# EAGLE board Brakeman_array-old (EAGLE 7.7.0)
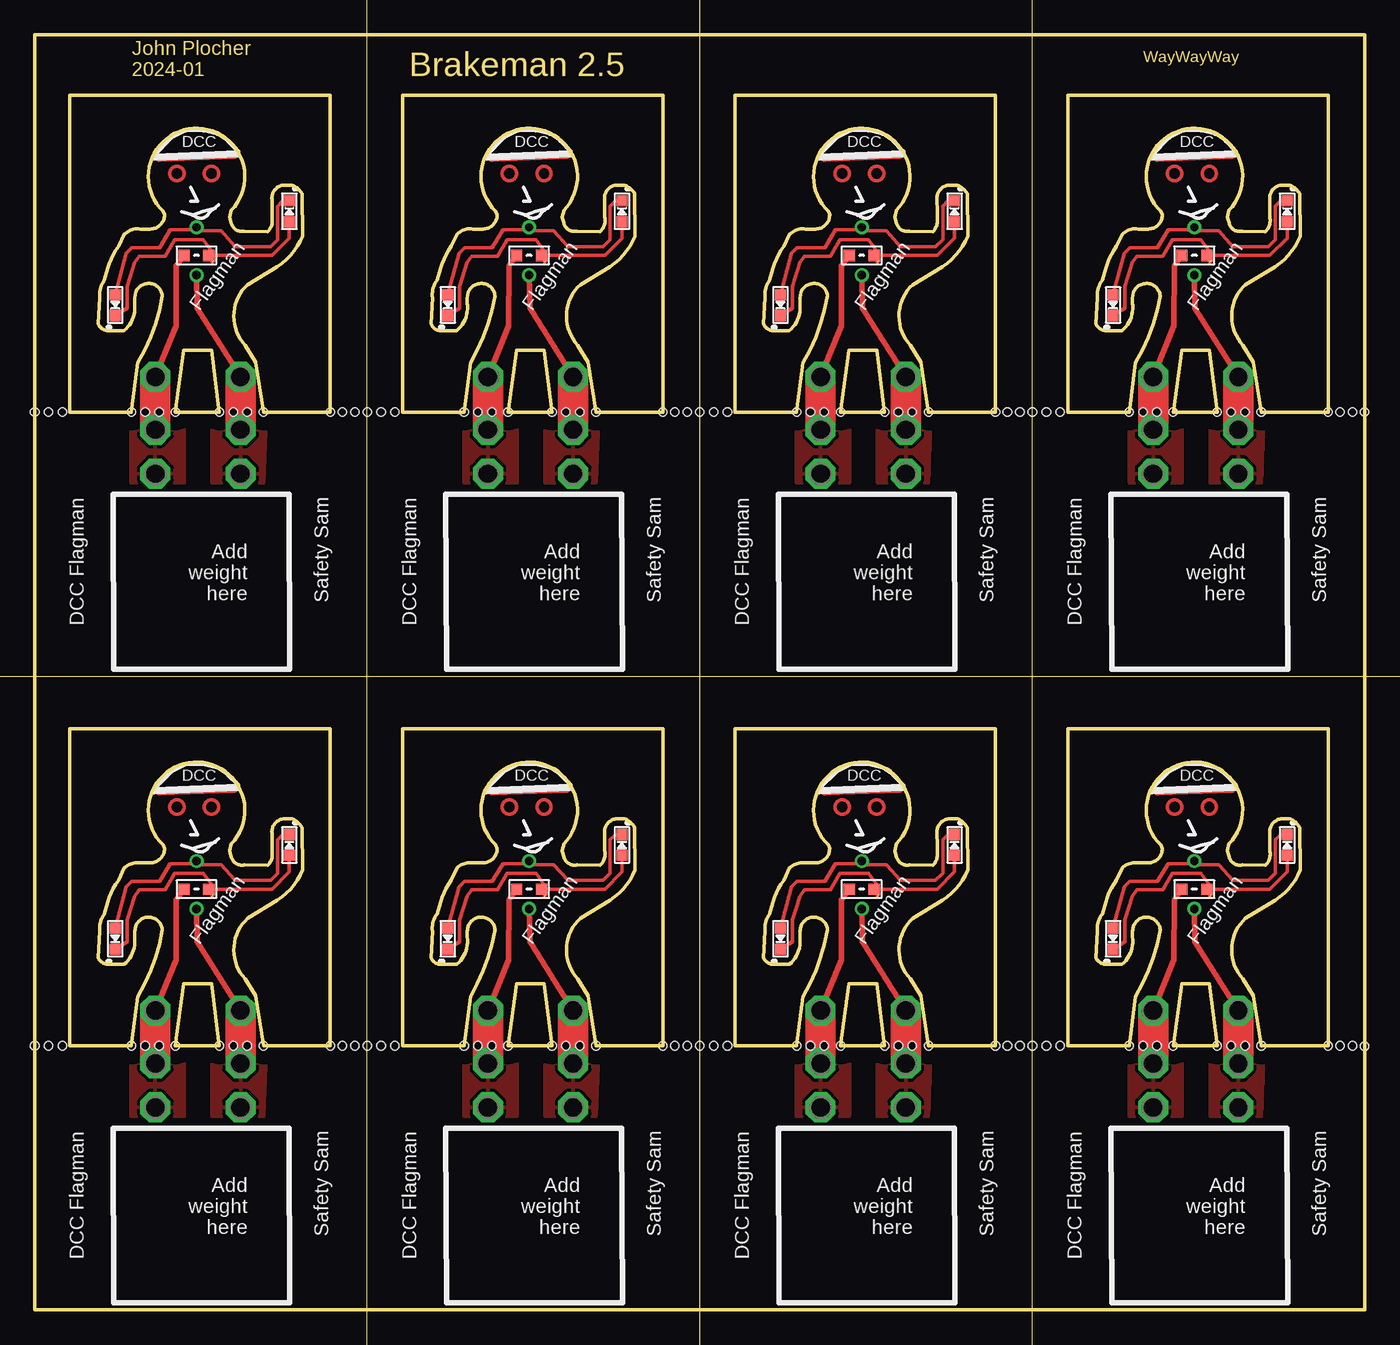
[diagram p0: board, top side]
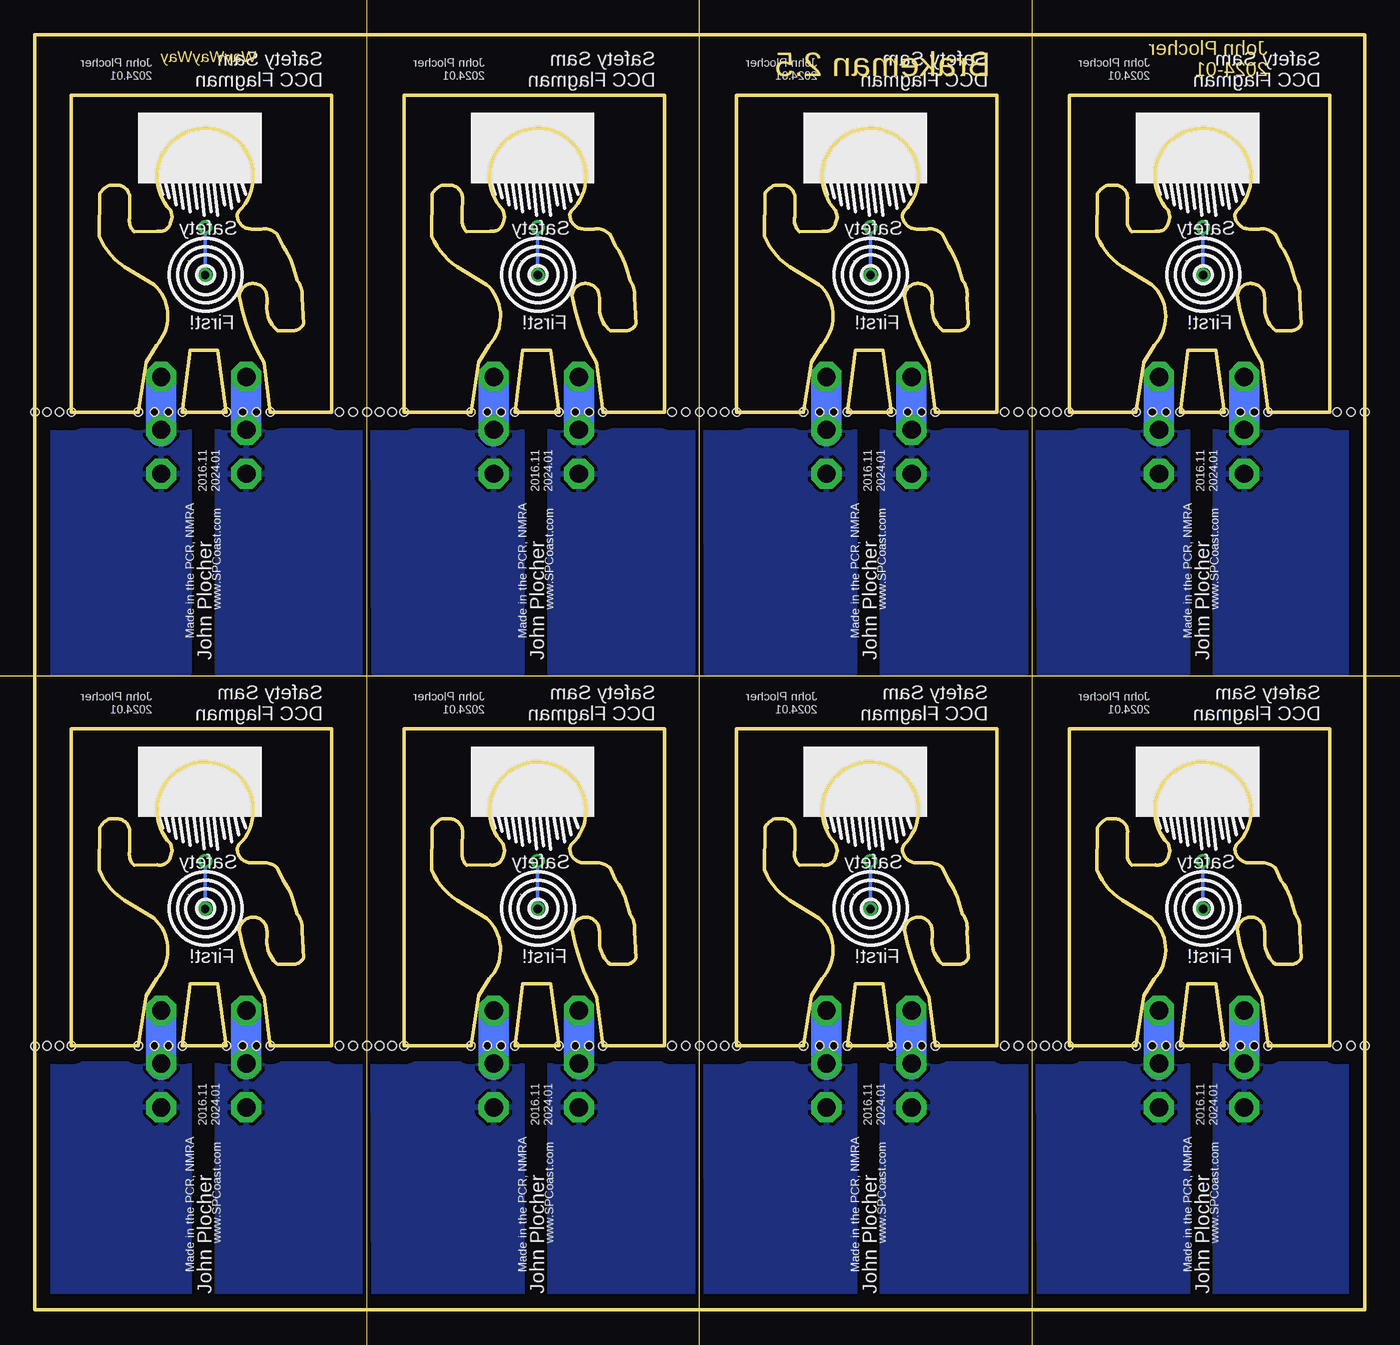
[diagram p1: board, bottom side, seen from below]

Size 96 x 92 mm. Coordinates in mm from the lower left corner, seen from the top.
Outline: 14.19,33.62 arc270 9.27,33.54 9.37,33.27 arc-90 8.36,32.26 7.63,32.26 arc53 6.48,31.88 6.06,31.01 arc21 5.29,29.42 5.03,28.56 arc43 4.7,27.3 4.59,25.41 arc63 5.3,24.92 6.45,24.92 arc59 7.21,26.91 7.21,27.28 7.29,27.69 arc-154 9.22,27.43 arc-21 7.44,22.61 6.99,19.05 2.54,19.05 2.54,41.91 21.34,41.91 21.34,19.05 16.51,19.05 15.95,22.66 15.19,23.88 arc-90 15.38,28.25 17.52,29.55 arc35 19.33,31.75 19.3,34.8 arc37 18.58,35.43 18.01,35.43 arc90 17.12,34.41 17.14,33.53 17.13,33.14 arc-59 16.81,32.06 15.14,32.11 arc-90 14.2,32.66 14.07,33.12 14.19,33.62
Outline: 13.34,19.05 12.77,23.53 10.77,23.53 10.16,19.05 13.34,19.05
Outline: 14.19,79.34 arc270 9.27,79.26 9.37,78.99 arc-90 8.36,77.98 7.63,77.98 arc53 6.48,77.6 6.06,76.73 arc21 5.29,75.14 5.03,74.28 arc43 4.7,73.02 4.59,71.13 arc63 5.3,70.64 6.45,70.64 arc59 7.21,72.63 7.21,73 7.29,73.41 arc-154 9.22,73.15 arc-21 7.44,68.33 6.99,64.77 2.54,64.77 2.54,87.63 21.34,87.63 21.34,64.77 16.51,64.77 15.95,68.38 15.19,69.6 arc-90 15.38,73.97 17.52,75.27 arc35 19.33,77.47 19.3,80.52 arc37 18.58,81.15 18.01,81.15 arc90 17.12,80.13 17.14,79.25 17.13,78.86 arc-59 16.81,77.78 15.14,77.83 arc-90 14.2,78.38 14.07,78.84 14.19,79.34
Outline: 13.34,64.77 12.77,69.25 10.77,69.25 10.16,64.77 13.34,64.77
Outline: 38.19,33.62 arc270 33.27,33.54 33.38,33.27 arc-90 32.36,32.26 31.63,32.26 arc53 30.48,31.88 30.06,31.01 arc21 29.29,29.42 29.03,28.56 arc43 28.7,27.3 28.6,25.41 arc63 29.3,24.92 30.45,24.92 arc59 31.22,26.91 31.22,27.28 31.29,27.69 arc-154 33.22,27.43 arc-21 31.45,22.61 30.99,19.05 26.54,19.05 26.54,41.91 45.34,41.91 45.34,19.05 40.51,19.05 39.95,22.66 39.19,23.88 arc-90 39.38,28.25 41.52,29.55 arc35 43.33,31.75 43.31,34.8 arc37 42.59,35.43 42.02,35.43 arc90 41.13,34.41 41.14,33.53 41.13,33.14 arc-59 40.81,32.06 39.14,32.11 arc-90 38.2,32.66 38.08,33.12 38.19,33.62
Outline: 37.34,19.05 36.77,23.53 34.77,23.53 34.16,19.05 37.34,19.05
Outline: 38.19,79.34 arc270 33.27,79.26 33.38,78.99 arc-90 32.36,77.98 31.63,77.98 arc53 30.48,77.6 30.06,76.73 arc21 29.29,75.14 29.03,74.28 arc43 28.7,73.02 28.6,71.13 arc63 29.3,70.64 30.45,70.64 arc59 31.22,72.63 31.22,73 31.29,73.41 arc-154 33.22,73.15 arc-21 31.45,68.33 30.99,64.77 26.54,64.77 26.54,87.63 45.34,87.63 45.34,64.77 40.51,64.77 39.95,68.38 39.19,69.6 arc-90 39.38,73.97 41.52,75.27 arc35 43.33,77.47 43.31,80.52 arc37 42.59,81.15 42.02,81.15 arc90 41.13,80.13 41.14,79.25 41.13,78.86 arc-59 40.81,77.78 39.14,77.83 arc-90 38.2,78.38 38.08,78.84 38.19,79.34
Outline: 37.34,64.77 36.77,69.25 34.77,69.25 34.16,64.77 37.34,64.77
Outline: 62.19,33.62 arc270 57.27,33.54 57.38,33.27 arc-90 56.36,32.26 55.63,32.26 arc53 54.48,31.88 54.07,31.01 arc21 53.3,29.42 53.03,28.56 arc43 52.7,27.3 52.6,25.41 arc63 53.3,24.92 54.45,24.92 arc59 55.22,26.91 55.22,27.28 55.3,27.69 arc-154 57.23,27.43 arc-21 55.45,22.61 54.99,19.05 50.55,19.05 50.55,41.91 69.34,41.91 69.34,19.05 64.52,19.05 63.96,22.66 63.2,23.88 arc-90 63.38,28.25 65.52,29.55 arc35 67.33,31.75 67.31,34.8 arc37 66.59,35.43 66.02,35.43 arc90 65.13,34.41 65.14,33.53 65.14,33.14 arc-59 64.81,32.06 63.14,32.11 arc-90 62.2,32.66 62.08,33.12 62.19,33.62
Outline: 61.34,19.05 60.77,23.53 58.77,23.53 58.17,19.05 61.34,19.05
Outline: 62.19,79.34 arc270 57.27,79.26 57.38,78.99 arc-90 56.36,77.98 55.63,77.98 arc53 54.48,77.6 54.07,76.73 arc21 53.3,75.14 53.03,74.28 arc43 52.7,73.02 52.6,71.13 arc63 53.3,70.64 54.45,70.64 arc59 55.22,72.63 55.22,73 55.3,73.41 arc-154 57.23,73.15 arc-21 55.45,68.33 54.99,64.77 50.55,64.77 50.55,87.63 69.34,87.63 69.34,64.77 64.52,64.77 63.96,68.38 63.2,69.6 arc-90 63.38,73.97 65.52,75.27 arc35 67.33,77.47 67.31,80.52 arc37 66.59,81.15 66.02,81.15 arc90 65.13,80.13 65.14,79.25 65.14,78.86 arc-59 64.81,77.78 63.14,77.83 arc-90 62.2,78.38 62.08,78.84 62.19,79.34
Outline: 61.34,64.77 60.77,69.25 58.77,69.25 58.17,64.77 61.34,64.77
Outline: 86.2,33.62 arc270 81.27,33.54 81.38,33.27 arc-90 80.37,32.26 79.64,32.26 arc53 78.49,31.88 78.07,31.01 arc21 77.3,29.42 77.04,28.56 arc43 76.71,27.3 76.6,25.41 arc63 77.31,24.92 78.45,24.92 arc59 79.22,26.91 79.22,27.28 79.3,27.69 arc-154 81.23,27.43 arc-21 79.45,22.61 78.99,19.05 74.55,19.05 74.55,41.91 93.34,41.91 93.34,19.05 88.52,19.05 87.96,22.66 87.2,23.88 arc-90 87.39,28.25 89.53,29.55 arc35 91.34,31.75 91.31,34.8 arc37 90.59,35.43 90.02,35.43 arc90 89.13,34.41 89.15,33.53 89.14,33.14 arc-59 88.82,32.06 87.15,32.11 arc-90 86.21,32.66 86.08,33.12 86.2,33.62
Outline: 85.34,19.05 84.77,23.53 82.77,23.53 82.17,19.05 85.34,19.05
Outline: 0,0 96,0 96,92 0,92 0,0
Outline: 86.2,79.34 arc270 81.27,79.26 81.38,78.99 arc-90 80.37,77.98 79.64,77.98 arc53 78.49,77.6 78.07,76.73 arc21 77.3,75.14 77.04,74.28 arc43 76.71,73.02 76.6,71.13 arc63 77.31,70.64 78.45,70.64 arc59 79.22,72.63 79.22,73 79.3,73.41 arc-154 81.23,73.15 arc-21 79.45,68.33 78.99,64.77 74.55,64.77 74.55,87.63 93.34,87.63 93.34,64.77 88.52,64.77 87.96,68.38 87.2,69.6 arc-90 87.39,73.97 89.53,75.27 arc35 91.34,77.47 91.31,80.52 arc37 90.59,81.15 90.02,81.15 arc90 89.13,80.13 89.15,79.25 89.14,78.86 arc-59 88.82,77.78 87.15,77.83 arc-90 86.21,78.38 86.08,78.84 86.2,79.34
Outline: 85.34,64.77 84.77,69.25 82.77,69.25 82.17,64.77 85.34,64.77
Copper layers (1*16): Top 0.035mm / dielectric 1.5mm / Bottom 0.035mm
Design rules "default": minimum track width 10mil, minimum drill 0.6mm, track to track 8mil, track to pad 8mil, pad to pad 8mil, via to via 8mil, smd to smd 8mil, copper to edge 40mil, drill to drill 8mil, minimum pad ring 10mil, minimum via ring 8mil, stop-mask expansion 4mil, vias tented up to drill 0mil, thermal gap 10mil
Holes 0.6 mm at 6.99,19.05 10.16,19.05 13.34,19.05 16.51,19.05 0,19.05 21.34,19.05 1,19.05 2,19.05 7.99,19.05 8.98,19.05 14.34,19.05 15.34,19.05 22.2,19.05 23.1,19.05 6.99,64.77 10.16,64.77 13.34,64.77 16.51,64.77 0,64.77 21.34,64.77 1,64.77 2,64.77 7.99,64.77 8.98,64.77 14.34,64.77 15.34,64.77 22.2,64.77 23.1,64.77 30.99,19.05 34.16,19.05 37.34,19.05 40.51,19.05 24,19.05 45.34,19.05 25,19.05 26,19.05 31.99,19.05 32.99,19.05 38.34,19.05 39.34,19.05 46.2,19.05 47.1,19.05 30.99,64.77 34.16,64.77 37.34,64.77 40.51,64.77 24,64.77 45.34,64.77 25,64.77 26,64.77 31.99,64.77 32.99,64.77 38.34,64.77 39.34,64.77 46.2,64.77 47.1,64.77 54.99,19.05 58.17,19.05 61.34,19.05 64.52,19.05 48.01,19.05 69.34,19.05 49.01,19.05 50.01,19.05 55.99,19.05 56.99,19.05 62.34,19.05 63.34,19.05 70.21,19.05 71.11,19.05 54.99,64.77 58.17,64.77 61.34,64.77 64.52,64.77 48.01,64.77 69.34,64.77 49.01,64.77 50.01,64.77 55.99,64.77 56.99,64.77 62.34,64.77 63.34,64.77 70.21,64.77 71.11,64.77 78.99,19.05 82.17,19.05 85.34,19.05 88.52,19.05 72.01,19.05 93.34,19.05 73.01,19.05 74.01,19.05 79.99,19.05 80.99,19.05 86.34,19.05 87.34,19.05 94.21,19.05 95.11,19.05 78.99,64.77 82.17,64.77 85.34,64.77 88.52,64.77 72.01,64.77 93.34,64.77 73.01,64.77 74.01,64.77 79.99,64.77 80.99,64.77 86.34,64.77 87.34,64.77 94.21,64.77 95.11,64.77 95.97,64.77 95.97,19.02
Milling: 4 lines

## Footprints (pad centres in the part's own frame; a part is rotated, then mirrored left to right if it is on the bottom)
0603-LED = smd 0.8 x 0.8: A 0.75,0; C -0.75,0
0603-RES = smd 0.813 x 0.813: 1 -0.9,0; 2 0.9,0
P1-13 = drill 1.321 pad 2.159 octagon: TP 0,0

## Placement (x,y rotation side)
LED1X11  R  [0603-LED]  5.82,26.77 90 top
LED1X12  R  [0603-LED]  5.82,72.49 90 top
LED1X21  R  [0603-LED]  29.82,26.77 90 top
LED1X22  R  [0603-LED]  29.82,72.49 90 top
LED1X31  R  [0603-LED]  53.82,26.77 90 top
LED1X32  R  [0603-LED]  53.82,72.49 90 top
LED1X41  R  [0603-LED]  77.82,26.77 90 top
LED1X42  R  [0603-LED]  77.82,72.49 90 top
LED2X11  R  [0603-LED]  18.39,33.55 270 top
LED2X12  R  [0603-LED]  18.39,79.27 270 top
LED2X21  R  [0603-LED]  42.39,33.55 270 top
LED2X22  R  [0603-LED]  42.39,79.27 270 top
LED2X31  R  [0603-LED]  66.39,33.55 270 top
LED2X32  R  [0603-LED]  66.39,79.27 270 top
LED2X41  R  [0603-LED]  90.39,33.55 270 top
LED2X42  R  [0603-LED]  90.39,79.27 270 top
R1KX11  1k0  [0603-RES]  11.68,30.35 180 top
R1KX12  1k0  [0603-RES]  11.68,76.07 180 top
R1KX21  1k0  [0603-RES]  35.69,30.35 180 top
R1KX22  1k0  [0603-RES]  35.69,76.07 180 top
R1KX31  1k0  [0603-RES]  59.69,30.35 180 top
R1KX32  1k0  [0603-RES]  59.69,76.07 180 top
R1KX41  1k0  [0603-RES]  83.69,30.35 180 top
R1KX42  1k0  [0603-RES]  83.69,76.07 180 top
TP1X11  PTR1PAD1-13  [P1-13]  8.71,17.78 90 top
TP1X12  PTR1PAD1-13  [P1-13]  8.71,63.5 90 top
TP1X21  PTR1PAD1-13  [P1-13]  32.72,17.78 90 top
TP1X22  PTR1PAD1-13  [P1-13]  32.72,63.5 90 top
TP1X31  PTR1PAD1-13  [P1-13]  56.72,17.78 90 top
TP1X32  PTR1PAD1-13  [P1-13]  56.72,63.5 90 top
TP1X41  PTR1PAD1-13  [P1-13]  80.72,17.78 90 top
TP1X42  PTR1PAD1-13  [P1-13]  80.72,63.5 90 top
TP2X11  PTR1PAD1-13  [P1-13]  8.71,14.61 0 top
TP2X12  PTR1PAD1-13  [P1-13]  8.71,60.33 0 top
TP2X21  PTR1PAD1-13  [P1-13]  32.72,14.61 0 top
TP2X22  PTR1PAD1-13  [P1-13]  32.72,60.33 0 top
TP2X31  PTR1PAD1-13  [P1-13]  56.72,14.61 0 top
TP2X32  PTR1PAD1-13  [P1-13]  56.72,60.33 0 top
TP2X41  PTR1PAD1-13  [P1-13]  80.72,14.61 0 top
TP2X42  PTR1PAD1-13  [P1-13]  80.72,60.33 0 top
TP3X11  PTR1PAD1-13  [P1-13]  14.86,17.78 0 top
TP3X12  PTR1PAD1-13  [P1-13]  14.86,63.5 0 top
TP3X21  PTR1PAD1-13  [P1-13]  38.86,17.78 0 top
TP3X22  PTR1PAD1-13  [P1-13]  38.86,63.5 0 top
TP3X31  PTR1PAD1-13  [P1-13]  62.87,17.78 0 top
TP3X32  PTR1PAD1-13  [P1-13]  62.87,63.5 0 top
TP3X41  PTR1PAD1-13  [P1-13]  86.87,17.78 0 top
TP3X42  PTR1PAD1-13  [P1-13]  86.87,63.5 0 top
TP4X11  PTR1PAD1-13  [P1-13]  14.86,14.61 0 top
TP4X12  PTR1PAD1-13  [P1-13]  14.86,60.33 0 top
TP4X21  PTR1PAD1-13  [P1-13]  38.86,14.61 0 top
TP4X22  PTR1PAD1-13  [P1-13]  38.86,60.33 0 top
TP4X31  PTR1PAD1-13  [P1-13]  62.87,14.61 0 top
TP4X32  PTR1PAD1-13  [P1-13]  62.87,60.33 0 top
TP4X41  PTR1PAD1-13  [P1-13]  86.87,14.61 0 top
TP4X42  PTR1PAD1-13  [P1-13]  86.87,60.33 0 top
TP5X11  PTR1PAD1-13  [P1-13]  8.71,21.59 0 top
TP5X12  PTR1PAD1-13  [P1-13]  8.71,67.31 0 top
TP5X21  PTR1PAD1-13  [P1-13]  32.72,21.59 0 top
TP5X22  PTR1PAD1-13  [P1-13]  32.72,67.31 0 top
TP5X31  PTR1PAD1-13  [P1-13]  56.72,21.59 0 top
TP5X32  PTR1PAD1-13  [P1-13]  56.72,67.31 0 top
TP5X41  PTR1PAD1-13  [P1-13]  80.72,21.59 0 top
TP5X42  PTR1PAD1-13  [P1-13]  80.72,67.31 0 top
TP6X11  PTR1PAD1-13  [P1-13]  14.86,21.59 0 top
TP6X12  PTR1PAD1-13  [P1-13]  14.86,67.31 0 top
TP6X21  PTR1PAD1-13  [P1-13]  38.86,21.59 0 top
TP6X22  PTR1PAD1-13  [P1-13]  38.86,67.31 0 top
TP6X31  PTR1PAD1-13  [P1-13]  62.87,21.59 0 top
TP6X32  PTR1PAD1-13  [P1-13]  62.87,67.31 0 top
TP6X41  PTR1PAD1-13  [P1-13]  86.87,21.59 0 top
TP6X42  PTR1PAD1-13  [P1-13]  86.87,67.31 0 top

## Library data of the parts
LED1X11 LED1X12 LED1X21 LED1X22 LED1X31 LED1X32 LED1X41 LED1X42 LED2X11 LED2X12 LED2X21 LED2X22 LED2X31 LED2X32 LED2X41 LED2X42 R1KX11 R1KX12 R1KX21 R1KX22 R1KX31 R1KX32 R1KX41 R1KX42 = SPCoast
TP1X11 TP1X12 TP1X21 TP1X22 TP1X31 TP1X32 TP1X41 TP1X42 TP2X11 TP2X12 TP2X21 TP2X22 TP2X31 TP2X32 TP2X41 TP2X42 TP3X11 TP3X12 TP3X21 TP3X22 TP3X31 TP3X32 TP3X41 TP3X42 TP4X11 TP4X12 TP4X21 TP4X22 TP4X31 TP4X32 TP4X41 TP4X42 TP5X11 TP5X12 TP5X21 TP5X22 TP5X31 TP5X32 TP5X41 TP5X42 TP6X11 TP6X12 TP6X21 TP6X22 TP6X31 TP6X32 TP6X41 TP6X42 = testpad

## Nets
LIMITEDX11: LED1X11.C LED2X11.A R1KX11.1
LIMITEDX12: LED1X12.C LED2X12.A R1KX12.1
LIMITEDX21: LED1X21.C LED2X21.A R1KX21.1
LIMITEDX22: LED1X22.C LED2X22.A R1KX22.1
LIMITEDX31: LED1X31.C LED2X31.A R1KX31.1
LIMITEDX32: LED1X32.C LED2X32.A R1KX32.1
LIMITEDX41: LED1X41.C LED2X41.A R1KX41.1
LIMITEDX42: LED1X42.C LED2X42.A R1KX42.1
NX11: LED1X11.A LED2X11.C TP3X11.TP TP4X11.TP TP6X11.TP
NX12: LED1X12.A LED2X12.C TP3X12.TP TP4X12.TP TP6X12.TP
NX21: LED1X21.A LED2X21.C TP3X21.TP TP4X21.TP TP6X21.TP
NX22: LED1X22.A LED2X22.C TP3X22.TP TP4X22.TP TP6X22.TP
NX31: LED1X31.A LED2X31.C TP3X31.TP TP4X31.TP TP6X31.TP
NX32: LED1X32.A LED2X32.C TP3X32.TP TP4X32.TP TP6X32.TP
NX41: LED1X41.A LED2X41.C TP3X41.TP TP4X41.TP TP6X41.TP
NX42: LED1X42.A LED2X42.C TP3X42.TP TP4X42.TP TP6X42.TP
SX11: R1KX11.2 TP1X11.TP TP2X11.TP TP5X11.TP
SX12: R1KX12.2 TP1X12.TP TP2X12.TP TP5X12.TP
SX21: R1KX21.2 TP1X21.TP TP2X21.TP TP5X21.TP
SX22: R1KX22.2 TP1X22.TP TP2X22.TP TP5X22.TP
SX31: R1KX31.2 TP1X31.TP TP2X31.TP TP5X31.TP
SX32: R1KX32.2 TP1X32.TP TP2X32.TP TP5X32.TP
SX41: R1KX41.2 TP1X41.TP TP2X41.TP TP5X41.TP
SX42: R1KX42.2 TP1X42.TP TP2X42.TP TP5X42.TP

## Tracks (layer width: path | path; a pad name or v marks a point on that pad's centre or on a via)
LIMITEDX11  (1 unrouted)
  Top 0.254: 12.91,29.97 arc90 R1KX11.1 17.14,30.35 18.39,31.59 LED2X11.A | 12.8,29.86 12.8,30.63 12.17,31.5 10.1,31.5 9.42,30.31 7.55,30.31 7.22,29.86 6.67,28.15 6.67,26.55 LED1X11.C
LIMITEDX12  (1 unrouted)
  Top 0.254: 12.91,75.69 arc90 R1KX12.1 17.14,76.07 18.39,77.31 LED2X12.A | 12.8,75.58 12.8,76.35 12.17,77.22 10.1,77.22 9.42,76.03 7.55,76.03 7.22,75.58 6.67,73.87 6.67,72.27 LED1X12.C
LIMITEDX21  (1 unrouted)
  Top 0.254: 36.92,29.97 arc90 R1KX21.1 41.15,30.35 42.39,31.59 LED2X21.A | 36.8,29.86 36.8,30.63 36.17,31.5 34.1,31.5 33.42,30.31 31.55,30.31 31.22,29.86 30.68,28.15 30.68,26.55 LED1X21.C
LIMITEDX22  (1 unrouted)
  Top 0.254: 36.92,75.69 arc90 R1KX22.1 41.15,76.07 42.39,77.31 LED2X22.A | 36.8,75.58 36.8,76.35 36.17,77.22 34.1,77.22 33.42,76.03 31.55,76.03 31.22,75.58 30.68,73.87 30.68,72.27 LED1X22.C
LIMITEDX31  (1 unrouted)
  Top 0.254: 60.92,29.97 arc90 R1KX31.1 65.15,30.35 66.39,31.59 LED2X31.A | 60.81,29.86 60.81,30.63 60.17,31.5 58.1,31.5 57.42,30.31 55.55,30.31 55.23,29.86 54.68,28.15 54.68,26.55 LED1X31.C
LIMITEDX32  (1 unrouted)
  Top 0.254: 60.92,75.69 arc90 R1KX32.1 65.15,76.07 66.39,77.31 LED2X32.A | 60.81,75.58 60.81,76.35 60.17,77.22 58.1,77.22 57.42,76.03 55.55,76.03 55.23,75.58 54.68,73.87 54.68,72.27 LED1X32.C
LIMITEDX41  (1 unrouted)
  Top 0.254: 84.92,29.97 arc90 R1KX41.1 89.15,30.35 90.39,31.59 LED2X41.A | 84.81,29.86 84.81,30.63 84.18,31.5 82.11,31.5 81.43,30.31 79.56,30.31 79.23,29.86 78.68,28.15 78.68,26.55 LED1X41.C
LIMITEDX42  (1 unrouted)
  Top 0.254: 84.92,75.69 arc90 R1KX42.1 89.15,76.07 90.39,77.31 LED2X42.A | 84.81,75.58 84.81,76.35 84.18,77.22 82.11,77.22 81.43,76.03 79.56,76.03 79.23,75.58 78.68,73.87 78.68,72.27 LED1X42.C
NX11  (via drill 0.6 pad 1.01)
  Top 0.254: LED1X11.A 6.62,30.51 7.02,30.91 9.02,30.91 9.8,32.2 11.49,32.2 v11.68,32.38 11.94,32.13 13.46,32.13 14.48,30.99 17.02,30.99 17.53,31.5 17.53,33.91 17.91,34.3 LED2X11.C
  Top 0.406: TP6X11.TP 11.73,26.54 v11.68,28.93
  Top 2.184: TP6X11.TP TP3X11.TP
  Bottom 0.254: v11.68,28.93 v11.68,32.38
  Bottom 2.184: TP6X11.TP 14.86,17.68
  pour Top: 12.83,20.32 16.76,20.32 16.51,13.97 12.83,13.97
  pour Bottom: 12.83,18.8 12.83,0.25 23.5,0.25 23.55,18.8
NX12  (via drill 0.6 pad 1.01)
  Top 0.254: LED1X12.A 6.62,76.23 7.02,76.63 9.02,76.63 9.8,77.92 11.49,77.92 v11.68,78.11 11.94,77.85 13.46,77.85 14.48,76.71 17.02,76.71 17.53,77.22 17.53,79.63 17.91,80.02 LED2X12.C
  Top 0.406: TP6X12.TP 11.73,72.26 v11.68,74.65
  Top 2.184: TP6X12.TP TP3X12.TP
  Bottom 0.254: v11.68,74.65 v11.68,78.11
  Bottom 2.184: TP6X12.TP 14.86,63.4
  pour Top: 12.83,66.04 16.76,66.04 16.51,59.69 12.83,59.69
  pour Bottom: 12.83,64.52 12.83,45.97 23.5,45.97 23.55,64.52
NX21  (via drill 0.6 pad 1.01)
  Top 0.254: LED1X21.A 30.62,30.51 31.02,30.91 33.02,30.91 33.8,32.2 35.49,32.2 v35.69,32.38 35.94,32.13 37.47,32.13 38.48,30.99 41.02,30.99 41.53,31.5 41.53,33.91 41.91,34.3 LED2X21.C
  Top 0.406: TP6X21.TP 35.74,26.54 v35.69,28.93
  Top 2.184: TP6X21.TP TP3X21.TP
  Bottom 0.254: v35.69,28.93 v35.69,32.38
  Bottom 2.184: TP6X21.TP 38.86,17.68
  pour Top: 36.83,20.32 40.77,20.32 40.51,13.97 36.83,13.97
  pour Bottom: 36.83,18.8 36.83,0.25 47.5,0.25 47.55,18.8
NX22  (via drill 0.6 pad 1.01)
  Top 0.254: LED1X22.A 30.62,76.23 31.02,76.63 33.02,76.63 33.8,77.92 35.49,77.92 v35.69,78.11 35.94,77.85 37.47,77.85 38.48,76.71 41.02,76.71 41.53,77.22 41.53,79.63 41.91,80.02 LED2X22.C
  Top 0.406: TP6X22.TP 35.74,72.26 v35.69,74.65
  Top 2.184: TP6X22.TP TP3X22.TP
  Bottom 0.254: v35.69,74.65 v35.69,78.11
  Bottom 2.184: TP6X22.TP 38.86,63.4
  pour Top: 36.83,66.04 40.77,66.04 40.51,59.69 36.83,59.69
  pour Bottom: 36.83,64.52 36.83,45.97 47.5,45.97 47.55,64.52
NX31  (via drill 0.6 pad 1.01)
  Top 0.254: LED1X31.A 54.62,30.51 55.02,30.91 57.02,30.91 57.81,32.2 59.49,32.2 v59.69,32.38 59.94,32.13 61.47,32.13 62.48,30.99 65.02,30.99 65.53,31.5 65.53,33.91 65.92,34.3 LED2X31.C
  Top 0.406: TP6X31.TP 59.74,26.54 v59.69,28.93
  Top 2.184: TP6X31.TP TP3X31.TP
  Bottom 0.254: v59.69,28.93 v59.69,32.38
  Bottom 2.184: TP6X31.TP 62.87,17.68
  pour Top: 60.83,20.32 64.77,20.32 64.52,13.97 60.83,13.97
  pour Bottom: 60.83,18.8 60.83,0.25 71.51,0.25 71.56,18.8
NX32  (via drill 0.6 pad 1.01)
  Top 0.254: LED1X32.A 54.62,76.23 55.02,76.63 57.02,76.63 57.81,77.92 59.49,77.92 v59.69,78.11 59.94,77.85 61.47,77.85 62.48,76.71 65.02,76.71 65.53,77.22 65.53,79.63 65.92,80.02 LED2X32.C
  Top 0.406: TP6X32.TP 59.74,72.26 v59.69,74.65
  Top 2.184: TP6X32.TP TP3X32.TP
  Bottom 0.254: v59.69,74.65 v59.69,78.11
  Bottom 2.184: TP6X32.TP 62.87,63.4
  pour Top: 60.83,66.04 64.77,66.04 64.52,59.69 60.83,59.69
  pour Bottom: 60.83,64.52 60.83,45.97 71.51,45.97 71.56,64.52
NX41  (via drill 0.6 pad 1.01)
  Top 0.254: LED1X41.A 78.63,30.51 79.03,30.91 81.03,30.91 81.81,32.2 83.5,32.2 v83.69,32.38 83.95,32.13 85.47,32.13 86.49,30.99 89.03,30.99 89.53,31.5 89.53,33.91 89.92,34.3 LED2X41.C
  Top 0.406: TP6X41.TP 83.74,26.54 v83.69,28.93
  Top 2.184: TP6X41.TP TP3X41.TP
  Bottom 0.254: v83.69,28.93 v83.69,32.38
  Bottom 2.184: TP6X41.TP 86.87,17.68
  pour Top: 84.84,20.32 88.77,20.32 88.52,13.97 84.84,13.97
  pour Bottom: 84.84,18.8 84.84,0.25 95.51,0.25 95.56,18.8
NX42  (via drill 0.6 pad 1.01)
  Top 0.254: LED1X42.A 78.63,76.23 79.03,76.63 81.03,76.63 81.81,77.92 83.5,77.92 v83.69,78.11 83.95,77.85 85.47,77.85 86.49,76.71 89.03,76.71 89.53,77.22 89.53,79.63 89.92,80.02 LED2X42.C
  Top 0.406: TP6X42.TP 83.74,72.26 v83.69,74.65
  Top 2.184: TP6X42.TP TP3X42.TP
  Bottom 0.254: v83.69,74.65 v83.69,78.11
  Bottom 2.184: TP6X42.TP 86.87,63.4
  pour Top: 84.84,66.04 88.77,66.04 88.52,59.69 84.84,59.69
  pour Bottom: 84.84,64.52 84.84,45.97 95.51,45.97 95.56,64.52
S$1X11
  Top 0.61: 9,37.4 14.4,37.6
S$1X12
  Top 0.61: 9,83.12 14.4,83.32
S$1X21
  Top 0.61: 33,37.4 38.4,37.6
S$1X22
  Top 0.61: 33,83.12 38.4,83.32
S$1X31
  Top 0.61: 57.01,37.4 62.41,37.6
S$1X32
  Top 0.61: 57.01,83.12 62.41,83.32
S$1X41
  Top 0.61: 81.01,37.4 86.41,37.6
S$1X42
  Top 0.61: 81.01,83.12 86.41,83.32
SX11
  Top 0.406: TP5X11.TP 10.21,25.27 10.22,29.61 R1KX11.2
  Top 2.184: TP5X11.TP TP1X11.TP
  Bottom 2.184: TP5X11.TP 8.71,17.73
  pour Top: 6.99,20.32 10.79,20.32 10.79,13.97 6.99,13.97
  pour Bottom: 0.5,18.8 10.79,18.8 10.79,0.25 0.5,0.25
SX12
  Top 0.406: TP5X12.TP 10.21,70.99 10.22,75.33 R1KX12.2
  Top 2.184: TP5X12.TP TP1X12.TP
  Bottom 2.184: TP5X12.TP 8.71,63.45
  pour Top: 6.99,66.04 10.79,66.04 10.79,59.69 6.99,59.69
  pour Bottom: 0.5,64.52 10.79,64.52 10.79,45.97 0.5,45.97
SX21
  Top 0.406: TP5X21.TP 34.21,25.27 34.23,29.61 R1KX21.2
  Top 2.184: TP5X21.TP TP1X21.TP
  Bottom 2.184: TP5X21.TP 32.72,17.73
  pour Top: 30.99,20.32 34.8,20.32 34.8,13.97 30.99,13.97
  pour Bottom: 24.5,18.8 34.8,18.8 34.8,0.25 24.5,0.25
SX22
  Top 0.406: TP5X22.TP 34.21,70.99 34.23,75.33 R1KX22.2
  Top 2.184: TP5X22.TP TP1X22.TP
  Bottom 2.184: TP5X22.TP 32.72,63.45
  pour Top: 30.99,66.04 34.8,66.04 34.8,59.69 30.99,59.69
  pour Bottom: 24.5,64.52 34.8,64.52 34.8,45.97 24.5,45.97
SX31
  Top 0.406: TP5X31.TP 58.22,25.27 58.23,29.61 R1KX31.2
  Top 2.184: TP5X31.TP TP1X31.TP
  Bottom 2.184: TP5X31.TP 56.72,17.73
  pour Top: 54.99,20.32 58.8,20.32 58.8,13.97 54.99,13.97
  pour Bottom: 48.51,18.8 58.8,18.8 58.8,0.25 48.51,0.25
SX32
  Top 0.406: TP5X32.TP 58.22,70.99 58.23,75.33 R1KX32.2
  Top 2.184: TP5X32.TP TP1X32.TP
  Bottom 2.184: TP5X32.TP 56.72,63.45
  pour Top: 54.99,66.04 58.8,66.04 58.8,59.69 54.99,59.69
  pour Bottom: 48.51,64.52 58.8,64.52 58.8,45.97 48.51,45.97
SX41
  Top 0.406: TP5X41.TP 82.22,25.27 82.23,29.61 R1KX41.2
  Top 2.184: TP5X41.TP TP1X41.TP
  Bottom 2.184: TP5X41.TP 80.72,17.73
  pour Top: 78.99,20.32 82.8,20.32 82.8,13.97 78.99,13.97
  pour Bottom: 72.51,18.8 82.8,18.8 82.8,0.25 72.51,0.25
SX42
  Top 0.406: TP5X42.TP 82.22,70.99 82.23,75.33 R1KX42.2
  Top 2.184: TP5X42.TP TP1X42.TP
  Bottom 2.184: TP5X42.TP 80.72,63.45
  pour Top: 78.99,66.04 82.8,66.04 82.8,59.69 78.99,59.69
  pour Bottom: 72.51,64.52 82.8,64.52 82.8,45.97 72.51,45.97
(copper drawn outside any net)
  shapes: Top circle x16

## Text on the board
Dimension: WayWayWay | John Plocher / 2024-01 | Brakeman 2.5
tPlace: DCC | DCC | DCC | DCC | Flagman | Flagman | Flagman | Flagman | DCC Flagman | DCC Flagman | DCC Flagman | DCC Flagman | Add / weight / here | Add / weight / here | Add / weight / here | Add / weight / here | Safety Sam | Safety Sam | Safety Sam | Safety Sam | DCC | DCC | DCC | DCC | Flagman | Flagman | Flagman | Flagman | DCC Flagman | DCC Flagman | DCC Flagman | DCC Flagman | Add / weight / here | Add / weight / here | Add / weight / here | Add / weight / here | Safety Sam | Safety Sam | Safety Sam | Safety Sam
bPlace: John Plocher / 2024.01 | John Plocher / 2024.01 | John Plocher / 2024.01 | John Plocher / 2024.01 | Safety Sam / DCC Flagman | Safety Sam / DCC Flagman | Safety Sam / DCC Flagman | Safety Sam / DCC Flagman | Safety | Safety | Safety | Safety | First! | First! | First! | First! | 2016.11 / 2024.01 | 2016.11 / 2024.01 | 2016.11 / 2024.01 | 2016.11 / 2024.01 | www.SPCoast.com | www.SPCoast.com | www.SPCoast.com | www.SPCoast.com | Made in the PCR, NMRA | Made in the PCR, NMRA | Made in the PCR, NMRA | Made in the PCR, NMRA | John Plocher | John Plocher | John Plocher | John Plocher | Safety Sam / DCC Flagman | John Plocher / 2024.01 | Safety Sam / DCC Flagman | John Plocher / 2024.01 | Safety Sam / DCC Flagman | John Plocher / 2024.01 | Safety Sam / DCC Flagman | John Plocher / 2024.01 | Safety | Safety | Safety | Safety | First! | First! | First! | First! | 2016.11 / 2024.01 | 2016.11 / 2024.01 | 2016.11 / 2024.01 | 2016.11 / 2024.01 | www.SPCoast.com | www.SPCoast.com | www.SPCoast.com | www.SPCoast.com | Made in the PCR, NMRA | Made in the PCR, NMRA | Made in the PCR, NMRA | Made in the PCR, NMRA | John Plocher | John Plocher | John Plocher | John Plocher
Milling: V-Score | V-Score | V-Score | V-Score